# Altium PCB PCB1.PcbDoc
Units mil, origin at the board's own origin, x right, y up, seen from the top; angles counter-clockwise.
Board outline 3897.95 x 1653.86 mil, 2 copper layers (Top Layer, Bottom Layer); 70 components, 76 nets, 264 pads, 83 vias.
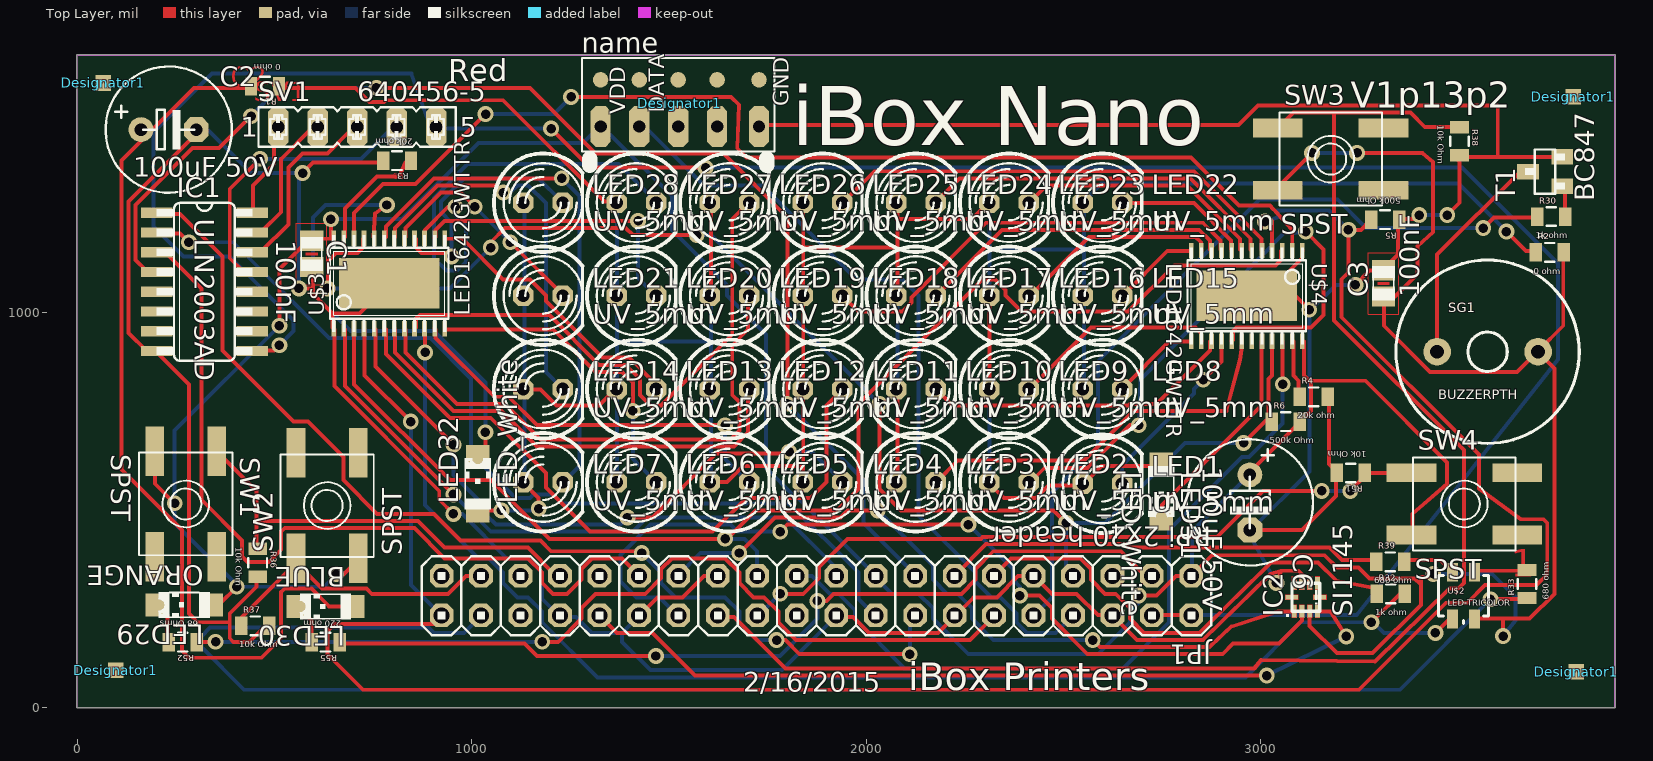
[diagram p0: Top Layer view]
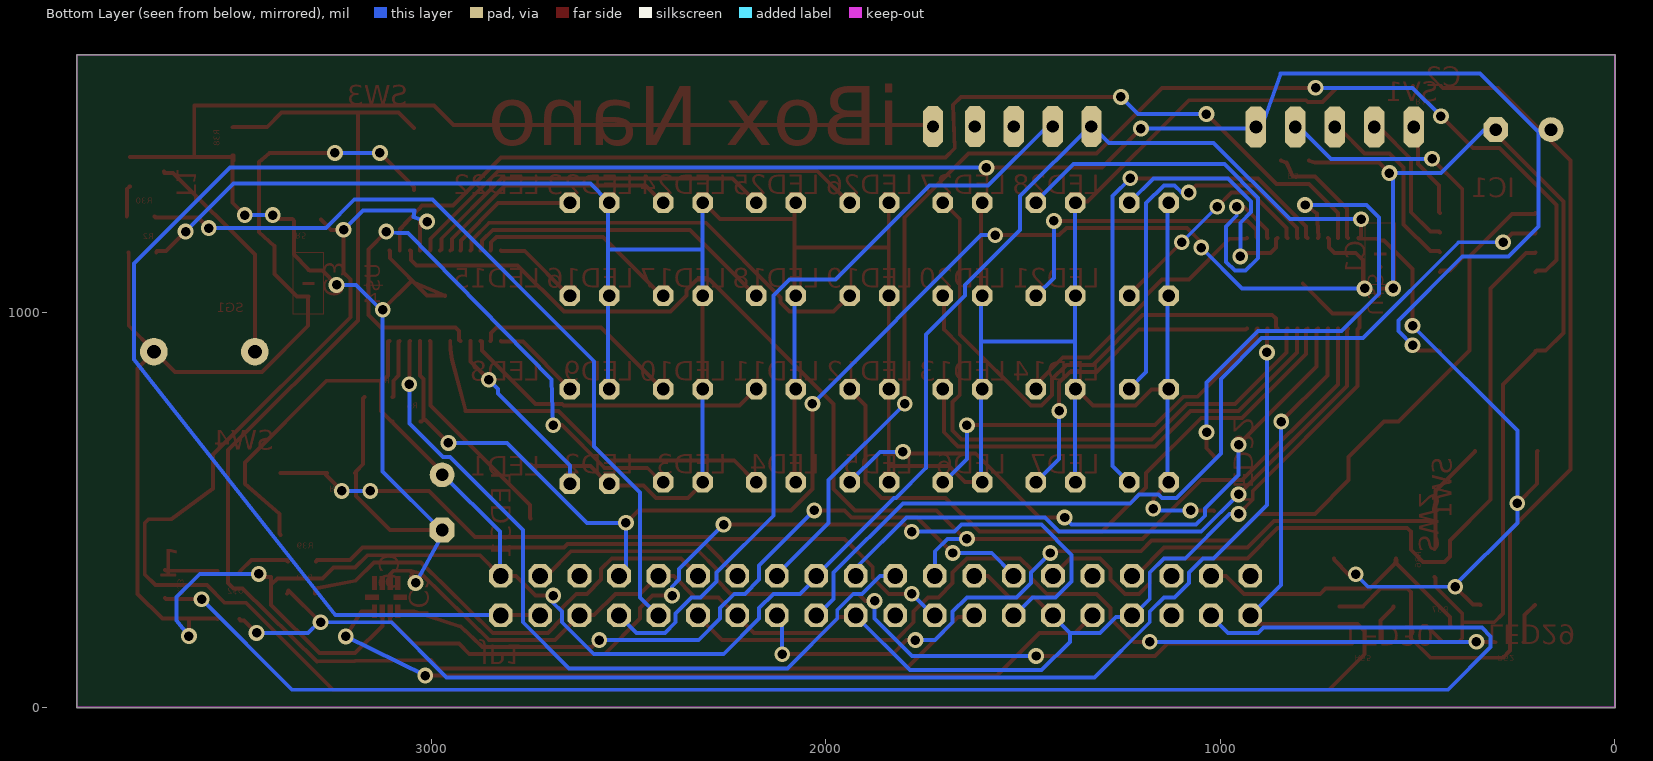
[diagram p1: Bottom Layer view, seen from below]

## Layer stack, top to bottom
Top Layer: signal copper 1.4
Dielectric: dielectric 12.6, FR-4, Dk 4.8
Bottom Layer: signal copper 1.4

## Board outline
-0.16,-0.16 3897.79,-0.16 3897.79,1653.7 -0.16,1653.7

## Design rules (kind name [scope] priority, off if disabled: settings)
Clearance [All] p1: gap=10
ComponentClearance [All] p1: gap=10 collisioncheckmode=3 verticalgap=10
PolygonConnect [All] p1: connectstyle=Relief reliefconductorwidth=10 reliefentries=4 polygonreliefangle="90 Angle"
RoutingVias [All] p1: holewidth=28 width=50 viastyle="Through Hole" minholewidth=28 minwidth=50 maxholewidth=28 maxwidth=50
SolderMaskExpansion [All] p1: expansion=4
TestPointUsage [All] p1: valid=0 allowmultiple=FALSE
Testpoint [All] p1: side=15 testpointundercomponent=TRUE minsize=40 maxsize=100 preferedsize=60 minholesize=0 maxholesize=40 preferedholesize=32 testpointgrid=1 style=1023 order=0-112345678
Width [All] p1: maxlimit=10 minlimit=10 preferedwidth=10
18 further rules are at their usual default settings.

## Components (designator, comment, footprint, x,y, rotation, side; value= is the part's Value field where it differs from the comment)
C1 "100nF" C0805 594.49,1149.61 r270 top
C2 "100uF 50V" E3,5-8 232.28,1464.57 r0 top
C3 "100nF" C0805 3311.02,1074.81 r90 top
C6 "100uF 50V" E3,5-8 2972.44,519.69 r270 top
Designator1 "Comment" FIDUCIAL-1X2 3799.21,90.55 r0 top (schematic designator FID1)
Designator1 "Comment" FIDUCIAL-1X2 66.93,1582.68 r0 top (schematic designator FID2)
Designator1 "Comment" MDF7-5S-2.54DSA 1279.53,1409.45 r0 top (schematic designator SV3_LCD_HEADER)
Designator1 "Comment" FIDUCIAL_1MM 98.43,94.49 r0 top (schematic designator U$1)
Designator1 "Comment" FIDUCIAL_1MM 3791.34,1547.25 r0 top (schematic designator U$5)
IC1 "ULN2003AD" SO16 322.83,1078.74 r270 top
IC2 "SI1145" QFN-10 3114.17,279.53 r90 top
JP1 "RPi 2x20 header" 2X20 1874.02,283.47 r180 top
LED1 "UV_5mm" LED5MM 2598.42,566.93 r0 top
LED2 "UV_5mm" LED5MM 2362.2,570.87 r0 top
LED3 "UV_5mm" LED5MM 2125.98,570.87 r0 top
LED4 "UV_5mm" LED5MM 1889.77,570.87 r0 top
LED5 "UV_5mm" LED5MM 1653.55,570.87 r0 top
LED6 "UV_5mm" LED5MM 1417.33,570.87 r0 top
LED7 "UV_5mm" LED5MM 1181.11,570.87 r0 top
LED8 "UV_5mm" LED5MM 2598.42,807.09 r0 top
LED9 "UV_5mm" LED5MM 2362.2,807.09 r0 top
LED10 "UV_5mm" LED5MM 2125.98,807.09 r0 top
LED11 "UV_5mm" LED5MM 1889.77,807.09 r0 top
LED12 "UV_5mm" LED5MM 1653.55,807.09 r0 top
LED13 "UV_5mm" LED5MM 1417.33,807.09 r0 top
LED14 "UV_5mm" LED5MM 1181.11,807.09 r0 top
LED15 "UV_5mm" LED5MM 2598.42,1043.31 r0 top
LED16 "UV_5mm" LED5MM 2362.2,1043.31 r0 top
LED17 "UV_5mm" LED5MM 2125.98,1043.31 r0 top
LED18 "UV_5mm" LED5MM 1889.77,1043.31 r0 top
LED19 "UV_5mm" LED5MM 1653.55,1043.31 r0 top
LED20 "UV_5mm" LED5MM 1417.33,1043.31 r0 top
LED21 "UV_5mm" LED5MM 1181.11,1043.31 r0 top
LED22 "UV_5mm" LED5MM 2598.42,1279.53 r0 top
LED23 "UV_5mm" LED5MM 2362.2,1279.53 r0 top
LED24 "UV_5mm" LED5MM 2125.98,1279.53 r0 top
LED25 "UV_5mm" LED5MM 1889.77,1279.53 r0 top
LED26 "UV_5mm" LED5MM 1653.55,1279.53 r0 top
LED27 "UV_5mm" LED5MM 1417.33,1279.53 r0 top
LED28 "UV_5mm" LED5MM 1181.11,1279.53 r0 top
LED29 "ORANGE" CHIPLED_1206 271.65,259.84 r90 top
LED30 "BLUE" CHIPLED_1206 629.92,255.91 r90 top
LED31 "LED_White" CHIPLED_1206 2748.03,547.25 r180 top
LED32 "LED_White" CHIPLED_1206 1015.75,566.93 r0 top
R1 "0 ohm" 0805 476.38,1574.81 r180 top
R2 "0 ohm" 0805 3732.28,1153.55 r0 top
R3 "20k ohm" 0805 811.02,1385.83 r180 top
R4 "20k ohm" 0805 3133.86,787.4 r0 top
R5 "500k Ohm" 0805 3314.96,1236.22 r180 top
R6 "500k Ohm" 0805 3062.99,724.41 r0 top
R30 "1k ohm" 0805 3736.22,1244.1 r0 top
R32 "1k ohm" 0805 3329.52,288.19 r0 top
R33 "680 ohm" 0805 3674.8,312.99 r90 top
R36 "10k Ohm" 0805 457.88,366.54 r270 top
R37 "10k Ohm" 0805 451.57,207.09 r0 top
R38 "10k Ohm" 0805 3503.54,1435.04 r270 top
R39 "680 ohm" 0805 3327.95,369.29 r0 top
R51 "10k Ohm" 0805 3228.34,594.49 r180 top
R52 "68 Ohms" 0805 267.72,165.35 r180 top
R55 "220 ohm" 0805 629.92,165.35 r180 top
SG1 "BUZZERPTH" BUZZER-12MM 3574.8,901.58 r0 top
SV1 "640456-5" FE05-1 709.84,1471.26 r0 top
SW1 "SPST" EVQ-Q2 275.59,515.75 r270 top
SW2 "SPST" EVQ-Q2 633.86,511.81 r90 top
SW3 "SPST" EVQ-Q2 3177.16,1389.77 r0 top
SW4 "SPST" EVQ-Q2 3515.74,515.75 r0 top
T1 "BC847" SOT23 3720.47,1358.27 r90 top
U$2 "LED-TRICOLOR" LED-TRICOLOR-SMD 3513.78,283.47 r0 top
U$3 "LED1642GWTTR" TSSOP24 791.34,1074.81 r0 top
U$4 "LED1642GWTTR" TSSOP24 2964.57,1043.31 r180 top

## Footprints (in the part's own frame and the unit in brackets; to place one, negate y for a bottom-side part, rotate by r counter-clockwise, add the part's x,y. Pads: shape width x height; smd on the part's side, far side on the other; paste and mask are expansions set on the pad)
2X20 [mil]
  oct 60x60 hole 40: 1(-950,-50) 2(-950,50) 3(-850,-50) 4(-850,50) 5(-750,-50) 6(-750,50) 7(-650,-50) 8(-650,50) 9(-550,-50) 10(-550,50) 11(-450,-50) 12(-450,50) 13(-350,-50) 14(-350,50) 15(-250,-50) 16(-250,50) 17(-150,-50) 18(-150,50) 19(-50,-50) 20(-50,50) 21(50,-50) 22(50,50) 23(150,-50) 24(150,50) 25(250,-50) 26(250,50) 27(350,-50) 28(350,50) 29(450,-50) 30(450,50) 31(550,-50) 32(550,50) 33(650,-50) 34(650,50) 35(750,-50) 36(750,50) 37(850,-50) 38(850,50) 39(950,-50) 40(950,50)
  silkscreen extent -1000,-100 1000,100
0805 [mm]
  rect 0.8x1.2 smd: 1(-0.9,0) 2(0.9,0)
  silkscreen extent -0.3,-0.6 0.3,0.6
BUZZER-12MM [mil]
  round 70 hole 35.43: +(127.95,0) -(-127.95,0)
  silkscreen extent -232,-232 232,232
C0805 [mm]
  rect 1.3x1.5 smd: 1(-0.85,0) 2(0.85,0)
  Top Layer region: -0.1,-0.4 0.1,-0.4 0.1,0.4 -0.1,0.4
  Top Layer lines w0.051: 1.973,-0.983 -1.973,-0.983 -1.973,0.983 1.973,0.983 1.973,-0.983
  silkscreen extent -1.09,-0.72 1.11,0.73
CHIPLED_1206 [mm]
  rect 1.5x1.5 smd: A(0,-1.75) C(0,1.75)
  silkscreen extent -0.85,-1.65 0.85,1.65
E3,5-8 [mil]
  round 63 hole 32: +(-70,0)
  oct 63x63 hole 32: -(70,0)
  silkscreen extent -160,-160 160,160
EVQ-Q2 [mm]
  rect 3.2x1.2 smd: A(-3.4,-2) A'(3.4,-2) B(-3.4,2) B'(3.4,2)
  silkscreen extent -3.3,-3 3.3,3
FE05-1 [mil]
  oct 52x104 hole 32: 1(-200,0) 2(-100,0) 3(0,0) 4(100,0) 5(200,0)
  silkscreen extent -250,-50 250,50
FIDUCIAL-1X2 [mm]
  rect 1x1 smd: 1(0,0)
FIDUCIAL_1MM [mm]
  rect 1x1 smd: 1(0,0)
LED5MM [mil]
  oct 52x52 hole 32: A(-50,0) K(50,0)
  silkscreen extent -125,-125 100,125
LED-TRICOLOR-SMD [mm]
  rect 0.7x1.2 smd: A(0.7,-1.5) B(0.7,1.5) G(-0.7,1.5) R(-0.7,-1.5)
  silkscreen extent -1.6,-1.8 1.6,1.3
MDF7-5S-2.54DSA [mm]
  oct 1.308x2.616 hole 0.8: 1(1.2,1.6) 2(3.7,1.6) 3(6.2,1.6) 4(8.7,1.6) 5(11.4,1.6)
  round 1 smd: ""(1.2,4.6) ""(3.7,4.6) ""(6.2,4.6) ""(8.7,4.6) ""(11.4,4.6)
  silkscreen extent 0,-0.9 12.4,6
QFN-10 [mm]
  rect 0.8x0.3 smd: 1(-0.9,0.75) 2(-0.9,0.25) 3(-0.9,-0.25) 4(-0.9,-0.75) 6(0.9,-0.75) 7(0.9,-0.25) 8(0.9,0.25) 9(0.9,0.75)
  rect 0.3x0.8 smd: 5(0,-0.9) 10(0,0.9)
  Top Layer region: -1.35,0.575 -0.475,0.575 -0.475,0.925 -1.35,0.925
  Top Layer region: -1.275,0.625 -0.525,0.625 -0.525,0.875 -1.275,0.875
  Top Layer region: -1.35,0.075 -0.475,0.075 -0.475,0.425 -1.35,0.425
  Top Layer region: -1.275,0.125 -0.525,0.125 -0.525,0.375 -1.275,0.375
  Top Layer region: -1.35,-0.425 -0.475,-0.425 -0.475,-0.075 -1.35,-0.075
  Top Layer region: -1.275,-0.375 -0.525,-0.375 -0.525,-0.125 -1.275,-0.125
  Top Layer region: -1.35,-0.925 -0.475,-0.925 -0.475,-0.575 -1.35,-0.575
  Top Layer region: -1.275,-0.875 -0.525,-0.875 -0.525,-0.625 -1.275,-0.625
  Top Layer region: 0.175,-1.35 0.175,-0.475 -0.175,-0.475 -0.175,-1.35
  Top Layer region: 0.125,-1.275 0.125,-0.525 -0.125,-0.525 -0.125,-1.275
  Top Layer region: 1.35,-0.575 0.475,-0.575 0.475,-0.925 1.35,-0.925
  Top Layer region: 1.275,-0.625 0.525,-0.625 0.525,-0.875 1.275,-0.875
  Top Layer region: 1.35,-0.075 0.475,-0.075 0.475,-0.425 1.35,-0.425
  Top Layer region: 1.275,-0.125 0.525,-0.125 0.525,-0.375 1.275,-0.375
  Top Layer region: 1.35,0.425 0.475,0.425 0.475,0.075 1.35,0.075
  Top Layer region: 1.275,0.375 0.525,0.375 0.525,0.125 1.275,0.125
  Top Layer region: 1.35,0.925 0.475,0.925 0.475,0.575 1.35,0.575
  Top Layer region: 1.275,0.875 0.525,0.875 0.525,0.625 1.275,0.625
  Top Layer region: -0.175,1.35 -0.175,0.475 0.175,0.475 0.175,1.35
  Top Layer region: -0.125,1.275 -0.125,0.525 0.125,0.525 0.125,1.275
  silkscreen extent -1.27,-0.9 0.9,1.27
SO16 [mil]
  rect 26x80 smd: 1(-175,-121) 2(-125,-121) 3(-75,-121) 4(-25,-121) 5(25,-121) 6(75,-121) 7(125,-121) 8(175,-121) 9(175,121) 10(125,121) 11(75,121) 12(25,121) 13(-25,121) 14(-75,121) 15(-125,121) 16(-175,121)
  silkscreen extent -200,-122 200,122
SOT23 [mm]
  rect 1x1.4 smd: 1(-0.95,-1.1) 2(0.95,-1.1) 3(0,1.1)
  silkscreen extent -1.42,-1.3 1.42,1.3
TSSOP24 [mil]
  rect 12x39 smd: 1(-140.75,-114.88) 2(-115.16,-114.88) 3(-89.57,-114.88) 4(-63.98,-114.88) 5(-38.39,-114.88) 6(-12.79,-114.88) 7(12.79,-114.88) 8(38.39,-114.88) 9(63.98,-114.88) 10(89.57,-114.88) 11(115.16,-114.88) 12(140.75,-114.88) 13(140.75,114.87) 14(115.16,114.87) 15(89.57,114.87) 16(63.98,114.87) 17(38.39,114.87) 18(12.79,114.87) 19(-12.79,114.87) 20(-38.39,114.87) 21(-63.98,114.87) 22(-89.57,114.87) 23(-115.16,114.87) 24(-140.75,114.87)
  rect 254x128 smd: P$100(0,0)
  silkscreen extent -150,-123 150,123

## Via types
v1: diameter 40, hole 24, Top Layer to Bottom Layer, 83 vias

## Nets (pads, with @x,y where several pads share a name; then routed paths per layer and width w, separated by ;. In a path a pad name is that pad's centre, name@x,y a point inside that pad or via, vN(x,y) a via of type N, cw(c..) or ccw(c..) an arc to the next point about the centre after c; other vN are vias at no path point)
B1_LED_BLU_GPIO27: JP1.13 R39.1 | length 1121
  Top Layer w10: JP1.13 2227.5,337.5 2304,414 2655,414 2664,405 3174.18,405 3205.68,373.5 3289.5,373.5 R39.1
B1_LED_GRN_GPIO4: JP1.38 R33.1 | length 4270.8
  Top Layer w10: v1(3582,274.5) 3672,274.5 R33.1
  Bottom Layer w10: JP1.38 1021.51,229.5 981.01,189 904.51,189 891.01,202.5 337.5,202.5 315,180 315,153 423,45 3352.5,45 v1(3582,274.5)
B1_LED_RED_GPIO17: JP1.11 R32.1 | length 1206
  Top Layer w10: JP1.11 2326.5,337.5 2367,378 2542.5,378 2569.5,351 2569.5,324 2605.5,288 2632.5,288 2668.5,252 2668.5,225 2704.5,189 2844,189 3026.25,367.31 3145.49,367.31 3191.62,321.19 3294,301.5 R32.1
BUTTON_A_GPIO13: JP1.33 R36.1 SW1.B | length 1120
  Top Layer w10: SW1.B 355.5,648 454.5,549 454.5,472.5 ; R36.1 454.5,405 454.5,472.5 ; JP1.33 1224.01,337.5 1210.51,337.5 1143.01,405 931.51,405 864.01,472.5 454.5,472.5
BUTTON_A_LED_GREEN_GPIO18: JP1.12 R52.1 | length 2281.7
  Top Layer w10: R52.1 306,166.5 v1(351,166.5) ; v1(1179.01,166.5) 1219.51,166.5 1278.01,225 1278.01,252 1314.01,288 1440.01,288 1480.51,328.5 1480.51,351 1507.51,378 1642.51,378 1678.51,342 1678.51,315 1714.51,279 1741.51,279 1777.51,243 1777.51,216 1822.51,171 2263.5,171 2322,229.5 JP1.12
  Bottom Layer w10: v1(351,166.5) v1(1179.01,166.5)
BUTTON_B_GPIO26: JP1.37 R37.1 SW2.B | length 757.8
  Top Layer w10: R37.1 418.5,211.5 418.5,229.5 553.5,364.5 553.5,373.5 SW2.B 558,364.5 621,301.5 733.5,301.5 747,288 940.51,288 985.51,333 1021.51,333 JP1.37
BUTTON_B_LED_BLU_GPIO2: JP1.3 R55.1 | length 2253.7
  Top Layer w10: R55.1 666,162 1134.01,162 1165.51,130.5 v1(1467.01,130.5) ; v1(1876.51,270) 1899,270 1917,288 2241,288 2277,324 2277,351 2322,396 2646,396 2704.5,337.5 2722.5,337.5 JP1.3
  Bottom Layer w10: v1(1467.01,130.5) 1782.01,130.5 1876.51,225 v1(1876.51,270)
BUTTON_C_GPIO7: JP1.26 R38.1 SW3.B | length 3859.3
  Top Layer w10: JP1.26 1624.51,229.5 1665.01,229.5 1795.51,99 2983.5,99 3000.94,120.38 3289.5,116.44 3478.5,301.5 3501,301.5 3514.5,315 3514.5,652.5 3186,981 3186,1507.5 ; SW3.B 3046.5,1471.5 3082.5,1507.5 3186,1507.5 ; R38.1 3501,1471.5 3415.5,1471.5 3379.5,1507.5 3186,1507.5
BUTTON_D_GPIO11: JP1.24 R51.1 SW4.B | length 1830.2
  Top Layer w10: v1(1782.01,288) 1840.51,288 1881.01,328.5 1881.01,355.5 1953,427.5 2290.5,427.5 2295,432 2889,432 3006,549 v1(3154.5,549) ; v1(3226.5,549) 3267,589.5 R51.1 3267,594 3379.5,594 SW4.B
  Bottom Layer w10: JP1.24 1728.01,234 v1(1782.01,288) ; v1(3154.5,549) v1(3226.5,549)
BUZZER_PIEZO_GPIO15: JP1.10 R30.1 | length 2037.1
  Top Layer w10: v1(3564,1215) 3591,1242 3699,1242 R30.1
  Bottom Layer w10: JP1.10 2425.5,234 2470.5,279 2470.5,544.5 2587.5,661.5 2587.5,877.5 2997,1287 3195,1287 3267,1215 v1(3564,1215)
GND-ISO: C1.2 C2.- C3.2 C6.- Designator1.5 IC1.8 IC2.8 JP1.6 JP1.9 JP1.14 JP1.20 JP1.25 JP1.30 JP1.34 R3.2 R4.2 R5.1 R36.2 R37.2 R38.2 R51.2 T1.2 U$3.1 U$3.P$100 U$4.1 U$4.P$100 | length 11313.2
  Top Layer w10: C2.- 328.5,1462.5 310.5,1462.5 130.5,1282.5 130.5,949.5 175.5,904.5 198,904.5 IC1.8 202.5,900 283.5,819 283.5,238.5 306,216 387,216 ; R36.2 454.5,328.5 454.5,306 387,238.5 387,216 ; R37.2 486,207 477,207 436.5,166.5 396,166.5 387,175.5 387,216 ; v1(562.5,1062) 598.5,1062 ; v1(571.5,1354.5) 598.5,1381.5 760.5,1381.5 R3.2 ; C1.2 598.5,1116 598.5,1062 ; U$3.P$100 787.5,1071 715.5,999 648,999 ; v1(954.01,490.5) 918.01,526.5 918.01,549 652.5,814.5 652.5,958.5 U$3.1 648,963 648,999 ; JP1.30 1426.51,234 1471.51,279 1534.51,279 1588.51,333 1620.01,333 JP1.25 ; Designator1.5 1732.51,1476 2943,1476 2992.5,1525.5 3510,1525.5 3600.55,1525.5 3600.55,1395 ; JP1.20 1926,229.5 1966.5,229.5 2007,189 2182.5,189 2223,229.5 JP1.14 2227.5,234 2272.5,279 2331,279 2385,333 2421,333 JP1.9 2425.5,333 2470.5,288 2533.5,288 2587.5,234 2623.5,234 JP1.6 2628,229.5 2686.5,171 2853,171 3024.57,338.63 3051.57,346.5 ; C6.- 2974.5,450 3105,450 3190.5,535.5 3190.5,594 R51.2 3190.5,598.5 3172.5,616.5 3172.5,783 R4.2 ; v1(3039.75,315.57) 3051.57,346.5 ; IC2.8 3105,315 3105,337.5 3096,346.5 3051.57,346.5 ; U$4.1 3105,1156.5 3105,1138.5 3010.5,1044 2965.5,1044 U$4.P$100 3051,1080 v1(3123,1008) ; v1(3240,1071) 3276,1107 3307.5,1107 C3.2 3312,1111.5 3348,1147.5 3348,1233 R5.1 3352.5,1237.5 3391.04,1237.5 v1(3401.57,1248.03) ; v1(3472.44,1248.03) 3503.54,1279.14 R38.2 ; R38.2@3501,1386 3501,1399.5 R38.2 ; T1.2 3762,1395 3600.55,1395 ; 598.5,1062 598.5,1048.5 648,999 ; R38.2 3505.5,1395 3600.55,1395
  Bottom Layer w10: C2.- 333,1462.5 441,1354.5 v1(571.5,1354.5) 562.5,1350 v1(562.5,1062) ; v1(954.01,490.5) 976.51,490.5 1089.01,378 1143.01,378 1179.01,342 1179.01,274.5 1219.51,234 JP1.34 1228.51,229.5 1264.51,229.5 1305.01,189 1381.51,189 ; JP1.30 1422.01,229.5 1381.51,189 ; JP1.20 1921.5,229.5 1786.51,94.5 1453.51,94.5 1381.51,166.5 1381.51,189 ; v1(3039.75,315.57) 2974.5,432 2974.5,445.5 C6.- 2974.5,450 3123,598.5 v1(3123,1008) 3127.5,1008 3190.5,1071 v1(3240,1071) ; v1(3401.57,1248.03) v1(3472.44,1248.03)
LCD_DATA_TX0_GPIO14: Designator1.2 JP1.8 | length 2002
  Bottom Layer w10: Designator1.2 1426.51,1471.5 1440.01,1471.5 1588.51,1323 1737.01,1323 1975.5,1084.5 2092.5,1084.5 2133,1044 2133,486 2277,342 2277,319.5 2317.5,279 2340,279 2380.5,238.5 2380.5,216 2407.5,189 2479.5,189 2520,229.5 JP1.8
LED+: LED1.A LED2.A LED3.A LED4.A LED5.A LED6.A LED7.A LED8.A LED9.A LED10.A LED11.A LED12.A LED13.A LED14.A LED15.A LED16.A LED17.A LED18.A LED19.A LED20.A LED21.A LED22.A LED23.A LED24.A LED25.A LED26.A LED27.A LED28.A LED31.A LED32.A R1.1 R2.1 | length 9209.8
  Top Layer w10: R1.1 513,1570.5 705.38,1570.5 741.38,1534.5 778.5,1534.5 783,1539 1080.01,1539 1336.51,1282.5 1363.51,1282.5 LED27.A ; LED32.A 1017.01,499.5 v1(1075.51,499.5) ; LED7.A 1134.01,567 1170.01,531 v1(1170.01,504) ; LED14.A 1134.01,805.5 1174.51,805.5 1215.01,765 1323.01,765 1363.51,805.5 LED13.A ; LED5.A 1606.51,571.5 1647.01,571.5 1687.51,612 1840.51,612 ; LED19.A 1606.51,1044 1606.51,1278 LED26.A ; LED4.A 1840.51,571.5 1840.51,612 ; LED25.A 1840.51,1278 1840.51,1165.5 ; LED3.A 2079,571.5 2079,805.5 LED10.A ; LED17.A 2079,1044 2079,1165.5 ; LED24.A 2079,1278 2079,1237.5 ; LED2.A 2313,567 2349,531 2430,531 2461.5,562.5 2547,562.5 LED1.A 2551.5,567 2596.5,612 2745,612 LED31.A ; LED9.A 2313,810 2313,1039.5 LED16.A ; LED23.A 2308.5,1278 2268,1237.5 2079,1237.5 ; v1(3622.5,1206) 3672,1156.5 3694.5,1156.5 R2.1 ; 1840.51,612 1840.51,805.5 LED11.A 1840.51,810 1840.51,1039.5 LED18.A 1840.51,1048.5 1840.51,1165.5 ; 1840.51,1165.5 2079,1165.5 ; 2079,1165.5 2079,1237.5
  Bottom Layer w10: v1(1075.51,499.5) 1165.51,499.5 v1(1170.01,504) ; LED7.A 1134.01,571.5 1134.01,805.5 LED14.A 1134.01,810 1134.01,1039.5 LED21.A 1134.01,1044 1134.01,1278 LED28.A ; LED6.A 1368.01,571.5 1368.01,805.5 LED13.A 1368.01,810 1368.01,927 ; LED27.A 1368.01,1278 1368.01,1048.5 LED20.A 1368.01,1039.5 1368.01,927 ; LED5.A 1606.51,571.5 1606.51,805.5 LED12.A 1606.51,810 1606.51,927 ; LED19.A 1606.51,1039.5 1606.51,927 ; LED10.A 2079,810 2079,1039.5 LED17.A ; LED2.A 2313,571.5 2313,805.5 LED9.A ; LED16.A 2313,1044 2313,1161 ; LED23.A 2313,1278 2313,1161 ; LED8.A 2551.5,810 2551.5,1039.5 LED15.A 2551.5,1044 2551.5,1161 ; v1(3622.5,1206) 3501,1327.5 2596.5,1327.5 2551.5,1282.5 LED22.A 2551.5,1278 2551.5,1161 ; 1368.01,927 1606.51,927 ; 2313,1161 2551.5,1161
N$1: LED2.K U$4.17 | length 1532.9
  Top Layer w10: LED2.K 2416.5,571.5 2452.5,607.5 2560.5,607.5 2668.5,715.5 v1(2691,715.5) ; U$4.17 2929.5,931.5 2929.5,954 2938.5,963 3127.5,963 3159,994.5 3159,1161 v1(3114,1206)
  Bottom Layer w10: v1(2691,715.5) 2694.93,830.82 3058.88,1202.63 3085.88,1202.63 v1(3114,1206)
N$2: LED3.K U$4.18 | length 993.1
  Top Layer w10: LED3.K 2178,571.5 2232,625.5 2551.5,625.5 2677.5,751.5 2912.61,751.5 2947.5,880.88 2951.43,907.32 U$4.18
N$3: LED6.K U$3.12 | length 809.5
  Top Layer w10: U$3.12 936.01,958.5 1206.01,958.5 1314.01,850.5 1381.51,850.5 1408.51,823.5 v1(1408.51,751.5)
  Bottom Layer w10: v1(1408.51,751.5) 1408.51,630 1467.01,571.5 LED6.K
N$4: LED4.K U$3.5 | length 1611.4
  Top Layer w10: U$3.5 756,958.5 756,864 v1(954.01,666) ; v1(1395.01,481.5) 1458.01,481.5 1620.01,643.5 1800.01,643.5 v1(1804.51,648)
  Bottom Layer w10: v1(954.01,666) 954.01,589.5 1039.51,504 1039.51,486 1062.01,463.5 1377.01,463.5 v1(1395.01,481.5) ; v1(1804.51,648) 1863.01,648 1939.5,571.5 LED4.K
N$5: LED5.K U$3.11 | length 1021.1
  Top Layer w10: U$3.11 909.01,958.5 909.01,936 1057.51,787.5 1093.51,787.5 1165.51,715.5 v1(1642.51,715.5)
  Bottom Layer w10: v1(1642.51,715.5) 1642.51,630 1701.01,571.5 LED5.K
N$6: LED22.K U$4.8 | length 341.8
  Top Layer w10: LED22.K 2650.5,1278 2830.5,1278 2925,1183.5 2925,1161 U$4.8
N$7: LED15.K U$4.12 | length 222.6
  Top Layer w10: LED15.K 2650.5,1044 2763,1156.5 2821.5,1156.5 U$4.12
N$8: R3.1 U$3.23 | length 300.7
  Top Layer w10: U$3.23 679.5,1192.5 679.5,1264.5 760.5,1345.5 816.19,1345.5 832.5,1381.5 R3.1
N$9: LED16.K U$4.11 | length 524.4
  Top Layer w10: LED16.K 2416.5,1044 2565,1192.5 2835,1192.5 2848.5,1179 2848.5,1161 U$4.11
N$10: LED17.K U$4.10 | length 802.7
  Top Layer w10: LED17.K 2178,1044 2344.5,1210.5 2844,1210.5 2871,1183.5 2871,1161 U$4.10
N$11: LED18.K U$4.9 | length 1120.7
  Top Layer w10: LED18.K 1944,1039.5 1980,1003.5 2092.5,1003.5 2115,1026 2115,1039.5 2304,1228.5 2853,1228.5 2898,1183.5 2898,1161 U$4.9
N$12: R4.1 U$4.23 | length 150.6
  Top Layer w10: U$4.23 3082.5,927 3082.5,841.5 3096,828 3096,787.5 R4.1
N$13: LED19.K U$3.8 | length 1374.6
  Top Layer w10: U$3.8 832.5,958.5 832.5,900 963.01,769.5 1084.51,769.5 1174.51,679.5 1656.01,679.5 1678.51,702 1678.51,774 1660.51,792 1660.51,918 1701.01,958.5 1701.01,1039.5 LED19.K
N$14: LED11.K U$3.6 | length 1695.7
  Top Layer w10: U$3.6 783,958.5 783,895.5 945.01,733.5 1048.51,733.5 1188.01,594 1188.01,558 1300.51,445.5 1611.01,445.5 1696.51,531 1858.51,531 1899,571.5 1899,765 1939.5,805.5 LED11.K
N$15: LED9.K U$4.14 | length 527.3
  Top Layer w10: LED9.K 2416.5,810 2569.5,963 2835,963 2848.5,949.5 2848.5,931.5 U$4.14
N$16: LED10.K U$4.15 | length 796.9
  Top Layer w10: LED10.K 2178,805.5 2218.5,765 2664,765 2668.5,769.5 2736,769.5 2871,904.5 2871,927 U$4.15
N$17: LED20.K U$3.14 | length 752.5
  Top Layer w10: U$3.14 909.01,1192.5 909.01,1210.5 931.51,1233 v1(1422.01,1233)
  Bottom Layer w10: v1(1422.01,1233) 1422.01,1089 1467.01,1044 LED20.K
N$18: LED12.K U$3.7 | length 1180.7
  Top Layer w10: U$3.7 805.5,958.5 805.5,900 954.01,751.5 1075.51,751.5 1165.51,661.5 1665.01,661.5 1701.01,697.5 1701.01,805.5 LED12.K
N$19: R39.2 U$2.G | length 138.3
  Top Layer w10: R39.2 3366,373.5 3456,373.5 3483,346.5 U$2.G
N$20: LED14.K U$3.18 | length 975.1
  Top Layer w10: U$3.18 805.5,1192.5 805.5,1215 913.51,1323 1062.01,1323 v1(1080.01,1305)
  Bottom Layer w10: v1(1080.01,1305) 1098.01,1305 1116.01,1323 1143.01,1323 1188.01,1278 1188.01,850.5 1228.51,810 LED14.K
N$21: LED21.K U$3.17 | length 574.4
  Top Layer w10: U$3.17 832.5,1192.5 832.5,1215 922.51,1305 972.01,1305 v1(1008.01,1269) ; v1(1098.01,1179) 1233.01,1044 LED21.K
  Bottom Layer w10: v1(1008.01,1269) v1(1098.01,1179)
N$23: LED23.K U$4.7 | length 641
  Top Layer w10: LED23.K 2416.5,1282.5 2457,1323 2812.5,1323 2947.5,1188 2947.5,1161 U$4.7
N$24: LED24.K U$4.6 | length 918.7
  Top Layer w10: LED24.K 2178,1282.5 2236.5,1341 2821.5,1341 2974.5,1188 2974.5,1161 U$4.6
N$25: LED25.K U$4.5 | length 1195.4
  Top Layer w10: LED25.K 1944,1282.5 2020.5,1359 2830.5,1359 3001.5,1188 3001.5,1161 U$4.5
N$26: LED26.K U$3.9 | length 1378.5
  Top Layer w10: U$3.9 859.51,963 859.51,985.5 868.51,994.5 1197.01,994.5 1323.01,868.5 1390.51,868.5 1426.51,832.5 1426.51,792 1453.51,765 1480.51,765 1660.51,945 1660.51,1237.5 1701.01,1278 LED26.K
N$27: LED27.K U$3.15 | length 1168.9
  Top Layer w10: U$3.15 882.01,1192.5 882.01,1210.5 940.51,1269 v1(958.51,1269)
  Bottom Layer w10: v1(958.51,1269) 958.51,1246.5 985.51,1219.5 985.51,1129.5 963.01,1107 936.01,1107 904.51,1138.5 904.51,1291.5 990.01,1377 1372.51,1377 1467.01,1282.5 LED27.K
N$28: LED28.K U$3.16 | length 635.4
  Top Layer w10: U$3.16 859.51,1188 859.51,1165.5 873.01,1152 940.51,1152 v1(949.51,1143)
  Bottom Layer w10: v1(949.51,1143) 949.51,1228.5 922.51,1255.5 922.51,1282.5 981.01,1341 1170.01,1341 1228.51,1282.5 LED28.K
N$29: LED13.K U$3.13 | length 707.9
  Top Layer w10: U$3.13 936.01,1188 976.51,1188 1080.01,1084.5 1147.51,1084.5 1188.01,1044 1188.01,1030.5 1332.01,886.5 1399.51,886.5 1467.01,819 1467.01,810 LED13.K
N$30: R30.2 T1.1 | length 80
  Top Layer w10: T1.1 3766.5,1318.5 3771,1314 3771,1246.5 R30.2
N$31: IC1.13 SV1.4 | length 733.7
  Top Layer w10: IC1.13 441,1107 418.5,1107 387,1138.5 387,1314 v1(463.5,1390.5)
  Bottom Layer w10: v1(463.5,1390.5) 720,1390.5 796.5,1467 SV1.4
N$33: SG1.- T1.3 | length 565
  Top Layer w10: SG1.- 3447,904.5 3447,1147.5 3654,1354.5 3676.5,1354.5 T1.3
N$34: 
N$36: LED7.K U$3.19 | length 1335
  Top Layer w10: U$3.19 783,1192.5 783,1219.5 904.51,1341 v1(1228.51,1341)
  Bottom Layer w10: v1(1228.51,1341) 1273.51,1296 1273.51,612 1233.01,571.5 LED7.K
N$37: R33.2 U$2.B | length 137.9
  Top Layer w10: U$2.B 3541.5,346.5 3672,346.5 R33.2
N$38: IC1.14 SV1.3 | length 481.2
  Top Layer w10: IC1.14 445.5,1156.5 468,1156.5 535.5,1224 535.5,1368 571.5,1404 634.5,1404 697.5,1467 SV1.3
N$39: LED29.C R52.2 | length 107.7
  Top Layer w10: LED29.C 207,256.5 229.5,234 229.5,166.5 R52.2
N$40: LED30.C R55.2 | length 104
  Top Layer w10: LED30.C 562.5,252 594,220.5 594,166.5 R55.2
N$41: LED8.K U$4.13 | length 225.8
  Top Layer w10: LED8.K 2650.5,810 2767.5,927 2821.5,927 U$4.13
N$46: 
N$47: LED1.K U$4.16 | length 466
  Top Layer w10: v1(2854.34,830.71) 2900.59,876.97 U$4.16
  Bottom Layer w10: LED1.K 2648.42,612.99 2830.7,795.28 2830.7,807.09 v1(2854.34,830.71)
N$58: IC1.16 SV1.1 | length 247.5
  Top Layer w10: IC1.16 445.5,1255.5 445.5,1323 499.5,1377 499.5,1467 SV1.1
N$59: IC1.15 SV1.2 | length 354.9
  Top Layer w10: IC1.15 445.5,1206 468,1206 517.5,1255.5 517.5,1390.5 594,1467 SV1.2
SDO_1: U$3.22 U$4.2 | length 2825.4
  Top Layer w10: U$3.22 701.77,1252.96 775.59,1326.78 858.27,1326.78 v1(1035.44,1503.94) ; v1(1251.97,1547.25) 1657.49,1547.25 1677.16,1527.56 1673.23,1417.33 1696.86,1393.7 2822.84,1393.7 2944.88,1271.66 3023.62,1271.66 3031.49,1263.78 3079.72,1211.62 U$4.2
  Bottom Layer w10: v1(1035.44,1503.94) 1208.66,1503.94 v1(1251.97,1547.25)
SI1145_INT: IC2.4 JP1.32 | length 2086.6
  Top Layer w10: JP1.32 1327.51,229.5 1368.01,189 1458.01,189 1566.01,81 v1(3015,81) ; IC2.4 3145.5,243 3176.99,243 v1(3216.36,180)
  Bottom Layer w10: v1(3015,81) v1(3216.36,180)
SI1145_SCL: IC2.2 JP1.28 | length 2264.7
  Top Layer w10: v1(1782.01,445.5) 1800.01,463.5 v1(2259,463.5) ; v1(2389.5,283.5) 2439,283.5 2470.5,252 2470.5,225 2560.5,135 2902.49,135 2929.49,162 3046.5,162 3105,220.5 3105,243 IC2.2
  Bottom Layer w10: JP1.28 1521.01,234 1476.01,279 1417.51,279 1377.01,319.5 1377.01,387 1453.51,463.5 1656.01,463.5 1674.01,445.5 v1(1782.01,445.5) ; v1(2259,463.5) 2371.5,351 2371.5,324 2389.5,306 v1(2389.5,283.5)
SI1145_SDA: IC2.1 JP1.27 | length 1837.7
  Top Layer w10: v1(1678.51,391.5) 1768.51,481.5 1935,481.5 1953,499.5 v1(2029.5,499.5) ; v1(2574,171) 2592,153 2869.88,153 2925.19,204.72 3043.3,243 3082.5,243 IC2.1
  Bottom Layer w10: JP1.27 1525.51,337.5 1579.51,391.5 v1(1678.51,391.5) ; v1(2029.5,499.5) 2169,360 2169,324 2205,288 2232,288 2268,252 2268,225 2322,171 v1(2574,171)
ST1642_CLK: JP1.23 U$3.3 U$4.3 | length 3329
  Top Layer w10: U$3.3 702,958.5 702,819 945.01,576 1048.51,576 1197.01,427.5 v1(1642.51,427.5) 1647.01,427.5 1719.01,499.5 1926,499.5 1980,553.5 1980,769.5 2295,1084.5 2326.5,1084.5 2353.5,1057.5 2353.5,1044 2394,1003.5 2664,1003.5 2781,1120.5 3037.5,1120.5 3051,1134 3051,1156.5 U$4.3
  Bottom Layer w10: v1(1642.51,427.5) 1692.01,427.5 1723.51,396 1723.51,337.5 JP1.23
ST1642_LE: JP1.40 R5.2 U$3.4 U$4.4 | length 5979.4
  Top Layer w10: U$3.4 729,958.5 729,841.5 v1(846.01,724.5) ; JP1.40 922.51,229.5 904.51,211.5 652.5,211.5 634.5,193.5 634.5,135 724.5,45 3249,45 3469.5,265.5 3523.5,265.5 3568.5,310.5 3699,310.5 3726,337.5 3726,468 3717,477 3658.5,477 3553.32,554.63 3553.32,640.69 3204,990 3204,1084.5 3222,1102.5 v1(3222,1210.5) 3253.5,1210.5 3276,1233 R5.2 ; v1(3010.5,1231.32) 3028.5,1233 3028.5,1161 U$4.4
  Bottom Layer w10: v1(846.01,724.5) 846.01,310.5 922.51,234 JP1.40 ; v1(3010.5,1231.32) 3044.82,1243.13 3042,1260 3172.5,1260 v1(3222,1210.5)
ST1642_PWCLK: JP1.7 R6.1 U$3.21 U$4.21 | length 3562.3
  Top Layer w10: v1(634.5,1062) 639,1066.5 639,1134 657,1152 711,1152 724.5,1165.5 724.5,1188 U$3.21 ; v1(1048.51,1165.5) 1048.51,1179 1084.51,1215 1390.51,1215 1408.51,1197 v1(1570.51,1197) ; v1(2034,769.5) 2034,553.5 2088,499.5 2475,499.5 v1(2506.5,468) ; v1(2956.5,670.5) 3015,729 R6.1 3024,724.5 3019.5,729 3019.5,832.5 3028.5,841.5 3028.5,927 U$4.21
  Bottom Layer w10: v1(634.5,1062) 945.01,1062 v1(1048.51,1165.5) ; v1(1570.51,1197) 1606.51,1197 v1(2034,769.5) ; JP1.7 2520,337.5 2506.5,351 v1(2506.5,468) 2605.5,468 2808,670.5 v1(2956.5,670.5)
ST1642_SDI: JP1.19 U$3.2 | length 1632.3
  Top Layer w10: U$3.2 679.5,958.5 679.5,814.5 v1(954.01,540)
  Bottom Layer w10: v1(954.01,540) 1048.51,445.5 1408.51,445.5 1444.51,481.5 1795.51,481.5 1921.5,355.5 1921.5,337.5 JP1.19
ST1642_SDO: JP1.21 U$4.22 | length 1944.9
  Top Layer w10: U$4.22 3055.5,927 v1(3055.5,819)
  Bottom Layer w10: JP1.21 1827.01,333 1863.01,333 1908,288 1930.5,288 1971,247.5 1971,225 2097,99 2650.5,99 2767.5,216 2767.5,450 2952,634.5 2970,634.5 3055.5,720 v1(3055.5,819)
STEPPER_ENABLE_GPIO25: JP1.22
U3_OUT10: R32.2 U$2.R U$3.10 | length 3471.8
  Top Layer w10: U$3.10 882.01,958.5 v1(882.01,900) ; v1(3280.5,216) 3361.5,297 R32.2 ; v1(3442.5,189) 3474,220.5 3483,220.5 U$2.R
  Bottom Layer w10: v1(882.01,900) 882.01,513 1017.01,378 1044.01,378 1080.01,342 1080.01,315 1116.01,279 1143.01,279 1179.01,243 1179.01,216 1318.51,76.5 2961,76.5 3100.5,216 v1(3280.5,216) 3285,216 3312,189 v1(3442.5,189)
U3_OUT15: LED32.C U$3.20 | length 1218
  Top Layer w10: U$3.20 751.5,1192.5 755.44,1252.13 v1(785.25,1273.5) ; LED32.C 1017.01,639 1035.01,657 v1(1035.01,697.5)
  Bottom Layer w10: v1(785.25,1273.5) 630,1273.5 598.5,1242 598.5,1048.5 693,954 904.51,954 1035.01,823.5 v1(1035.01,697.5)
U4_OUT14: U$4.19
U4_OUT15: LED31.C U$4.20 | length 555.4
  Top Layer w10: LED31.C 2749.5,481.5 2749.5,513 3001.5,765 3001.5,927 U$4.20
ULN2003_GPIO23_STP_IN1: IC1.1 JP1.16 | length 2682.8
  Top Layer w10: IC1.1 202.5,1251 261,1251 369,1143 369,904.5 549,724.5 585,724.5 675,634.5 675,576 760.5,490.5 904.51,490.5 972.01,423 1174.51,423 1201.51,396 1426.51,396 v1(1431.01,391.5) ; v1(1773.01,171) 1795.51,171 1831.51,135 v1(2110.5,135)
  Bottom Layer w10: v1(1431.01,391.5) 1480.51,342 1480.51,315 1516.51,279 1642.51,279 1678.51,243 1678.51,216 1723.51,171 v1(1773.01,171) ; v1(2110.5,135) 2110.5,216 2124,229.5 JP1.16
ULN2003_GPIO24_STP_IN2: IC1.2 JP1.18 | length 2382.4
  Top Layer w10: IC1.2 202.5,1201.5 261,1201.5 v1(283.5,1179)
  Bottom Layer w10: v1(283.5,1179) 396,1179 639,936 895.51,936 999.01,832.5 999.01,643.5 1111.51,531 1147.51,531 1156.51,540 1206.01,540 1228.51,517.5 1804.51,517.5 1980,342 1980,274.5 2020.5,234 JP1.18
ULN2003_IN4: IC1.4 JP1.15 | length 3158.5
  Top Layer w10: IC1.4 198,1107 175.5,1107 148.5,1134 148.5,1273.5 292.5,1417.5 360,1417.5 v1(441,1498.5) ; v1(758.81,1570.5) 1147.51,1570.5 1314.01,1404 1638.01,1404 1800.01,1242 v1(1800.01,769.5)
  Bottom Layer w10: v1(441,1498.5) 513,1570.5 v1(758.81,1570.5) ; v1(1800.01,769.5) 1993.5,576 1993.5,468 2124,337.5 JP1.15
ULN2003_STEPPER_IN3: IC1.3 JP1.29 | length 2104
  Top Layer w10: IC1.3 202.5,1152 225,1152 315,1062 315,526.5 418.5,423 418.5,382.5 432,369 486,369 517.5,400.5 517.5,445.5 526.5,454.5 855.01,454.5 931.51,378 1143.01,378 1179.01,342 1179.01,315 1206.01,288 1242.01,288 1278.01,324 1278.01,351 1305.01,378 1381.51,378 1422.01,337.5 JP1.29
UV_LED_CTRL_GPIO19: JP1.35
VDD: C1.1 C3.1 C6.+ Designator1.1@1326.78,1472.44 IC2.3 JP1.1 JP1.17 LED29.A R2.2 R6.2 SG1.+ SW1.A SW2.A SW3.A SW4.A U$2.A U$3.24 U$4.24 | length 10443.6
  Top Layer w10: SW1.A 198,648 198,567 v1(247.5,517.5) ; LED29.A 342,261 360,261 v1(405,306) ; v1(513,967.5) 513,1111.5 585,1183.5 589.5,1183.5 C1.1 598.5,1183.5 603,1188 643.5,1188 ; v1(643.5,1237.5) 643.5,1188 ; U$3.24 648,1188 643.5,1188 ; v1(657,337.5) 675,337.5 711,373.5 SW2.A ; v1(2691,283.5) 2736,283.5 2785.5,333 2821.5,333 JP1.1 2876.38,385.83 3161.41,385.83 3192.91,354.33 3248.03,354.33 3275.59,326.77 3389.76,326.77 3405.51,311.02 ; C6.+ 2970,594 3096,720 R6.2 3100.5,724.5 3127.5,751.5 3127.5,823.5 3125.25,825.75 ; SW3.A 3043.3,1318.9 v1(3129.92,1405.52) ; U$4.24 3109.5,927 3109.5,841.5 3125.25,825.75 ; IC2.3 3124.01,206.69 3192.91,137.8 3283.46,137.8 3405.51,259.84 3405.51,311.02 ; v1(3244.09,1405.52) 3409.44,1405.52 3437,1381.89 3437,1204.73 3397.63,1169.29 3397.63,1098.43 3340.55,1041.34 C3.1 3312,1039.5 3312,967.5 3429,850.5 3649.5,850.5 3699,900 SG1.+ ; SW4.A 3384,441 3384,490.5 3472.32,567 3472.32,621 3265.32,828 3127.5,828 3125.25,825.75 ; v1(3437,338.58) 3429.13,330.71 3405.51,330.71 3405.51,311.02 ; U$2.A 3541.5,225 3614.17,225 ; v1(3614.17,181.1) 3614.17,225 ; R2.2 3766.5,1152 3766.5,967.5 3703.5,904.5 SG1.+ ; 3614.17,225 3681,225 3744,288 3744,859.5 3703.5,900 SG1.+
  Bottom Layer w10: v1(513,967.5) 247.5,702 v1(247.5,517.5) 247.5,468 405,310.5 v1(405,306) 625.5,306 v1(657,337.5) ; v1(643.5,1237.5) 823.5,1237.5 1017.01,1431 1282.51,1431 1323.01,1471.5 1326.78,1472.44 1332.01,1471.5 1507.51,1296 1507.51,1210.5 1647.01,1071 1647.01,1044 1746.01,945 1746.01,607.5 1822.51,531 1827.01,531 2020.5,337.5 JP1.17 2025,328.5 2065.5,288 2133,288 2169,252 2169,225 2259,135 2587.5,135 2668.5,216 2668.5,243 2691,265.5 v1(2691,283.5) ; JP1.1 2826,337.5 2826,445.5 2970,589.5 C6.+ ; v1(3129.92,1405.52) v1(3244.09,1405.52) ; v1(3437,338.58) 3586.61,338.58 3645.66,279.53 3645.66,220.47 v1(3614.17,181.1)
VSS: C2.+ IC1.9 JP1.2 JP1.4 LED30.A R1.2 SV1.5 | length 8740.3
  Top Layer w10: R1.2 436.5,1570.5 297,1570.5 193.5,1467 C2.+ 189,1462.5 112.5,1386 112.5,603 265.5,450 265.5,144 283.5,126 468,126 517.5,175.5 517.5,292.5 526.5,301.5 594,301.5 639,256.5 697.5,256.5 LED30.A ; IC1.9 445.5,904.5 499.5,904.5 v1(513,918) ; v1(1201.51,1467) 1300.51,1368 v1(1593.01,1368) ; JP1.4 2727,234 2821.5,234 JP1.2
  Bottom Layer w10: v1(513,918) 549,954 549,981 387,1143 270,1143 193.5,1219.5 193.5,1462.5 C2.+ 198,1462.5 342,1606.5 847.12,1606.5 895.51,1471.5 SV1.5 900.01,1467 v1(1201.51,1467) ; v1(1593.01,1368) 3510,1368 3753,1125 3753,882 3242.79,234 2826,234 JP1.2
pads on no net: Designator1. Designator1.1@66.93,1582.68 Designator1.1@98.43,94.49 Designator1.1@3791.34,1547.25 Designator1.1@3799.21,90.55 Designator1.3 Designator1.4 IC1.5 IC1.6 IC1.7 IC1.10 IC1.11 IC1.12 IC2.5 IC2.6 IC2.7 IC2.9 IC2.10 JP1.5 JP1.31 JP1.36 JP1.39 SW1.A' SW1.B' SW2.A' SW2.B' SW3.A' SW3.B' SW4.A' SW4.B'

## Keep-outs
Keep-Out Layer:
  the board outline again, w0.31

## Other copper
Top Layer:
  text "C2" at 389.84,1574.57 h50
  text "R1" at 506.38,1542.31 h16 r180
  text "SV1" at 448.03,1536.26 h50
  text "SW3" at 3059.05,1527.56 h50
  text "R38" at 3536.04,1465.04 h16 r270
  text "iBox Nano" at 1811.03,1425.2 h150
  text "R3" at 829.21,1353.33 h16 r180
  text "LED28" at 1306.11,1300.53 h50
  text "LED27" at 1542.33,1300.53 h50
  text "LED26" at 1778.55,1300.53 h50
  text "LED25" at 2014.77,1300.53 h50
  text "LED24" at 2250.98,1300.53 h50
  text "LED23" at 2487.2,1300.53 h50
  text "LED22" at 2723.42,1300.53 h50
  text "IC1" at 252.84,1293.74 h50
  text "T1" at 3645.47,1283.27 h50 r90
  text "R30" at 3706.22,1276.6 h16
  text "R5" at 3344.96,1203.72 h16 r180
  text "R2" at 3702.28,1186.05 h16
  text "C1" at 634.49,1184.61 h50 r270
  text "U$4" at 3129.74,1125.31 h40 r270
  text "LED21" at 1306.11,1064.31 h50
  text "LED20" at 1542.33,1064.31 h50
  text "LED19" at 1778.55,1064.31 h50
  text "LED18" at 2014.77,1064.31 h50
  text "LED17" at 2250.98,1064.31 h50
  text "LED16" at 2487.2,1064.31 h50
  text "LED15" at 2723.42,1064.31 h50
  text "C3" at 3271.02,1039.81 h50 r90
  text "SG1" at 3474.8,1001.58 h24
  text "U$3" at 626.16,992.81 h40 r90
  text "LED14" at 1306.11,828.09 h50
  text "LED13" at 1542.33,828.09 h50
  text "LED12" at 1778.55,828.09 h50
  text "LED11" at 2014.77,828.09 h50
  text "LED10" at 2250.98,828.09 h50
  text "LED9" at 2487.2,828.09 h50
  text "LED8" at 2723.42,828.09 h50
  text "R4" at 3103.86,819.91 h16
  text "R6" at 3032.99,756.91 h16
  text "SW4" at 3397.63,653.54 h50
  text "SW1" at 413.39,633.86 h50 r270
  text "LED31" at 2798.03,597.24 h50 r270
  text "LED7" at 1306.11,591.87 h50
  text "LED6" at 1542.33,591.87 h50
  text "LED5" at 1778.55,591.87 h50
  text "LED4" at 2014.77,591.87 h50
  text "LED3" at 2250.98,591.87 h50
  text "LED2" at 2487.2,591.87 h50
  text "LED1" at 2723.42,587.93 h50
  text "R51" at 3258.34,561.99 h16 r180
  text "LED32" at 965.75,516.93 h50 r90
  text "R39" at 3297.95,401.79 h16
  text "R36" at 490.38,396.53 h16 r270
  text "SW2" at 496.06,393.7 h50 r90
  text "C6" at 3082.44,389.69 h50 r270
  text "1" at 3633.86,330.71 h70
  text "R32" at 3299.52,320.69 h16
  text "U$2" at 3473.78,288.47 h16
  text "R33" at 3642.3,282.99 h16 r90
  text "R37" at 421.58,239.59 h16
  text "IC2" at 3055.11,230.32 h50 r90
  text "LED29" at 321.66,209.84 h50 r180
  text "LED30" at 679.92,205.91 h50 r180
  text "JP1" at 2874.01,158.47 h50 r180
  text "R52" at 297.72,132.85 h16 r180
  text "R55" at 659.92,132.85 h16 r180

## Silkscreen, mask and mechanical layers (free items; w line width, h text height)
Top Overlay:
  text "Red" at 940.95,1586.62 h56
  text "GND" at 1803.15,1523.63 h40 r90
  text "V1p13p2" at 3228.34,1519.69 h66
  text "DATA" at 1488.19,1507.88 h40 r90
  text "VDD" at 1389.77,1503.94 h40 r90
  text "iBox Nano" at 1811.03,1425.2 h150
  text "iBox Printers" at 2106.29,43.31 h70
  text "2/16/2015" at 1688.98,39.37 h50

## Text inside footprints (layer, text, board x,y; h text height)
Designator1: Top Overlay "name" at 1279.53,1659.45 h50
SV1: Top Overlay "1" at 414.84,1446.26 h50; Top Overlay "5" at 969.85,1446.26 h50